# Altium PCB BOARD.PcbDoc
Units mm, origin at the board's own origin, x right, y up, seen from the top; angles counter-clockwise.
Board outline 38 x 24 mm, 2 copper layers (Top Layer, Bottom Layer), stack 1.18 mm thick; 27 components, 23 nets, 100 pads, 105 vias.
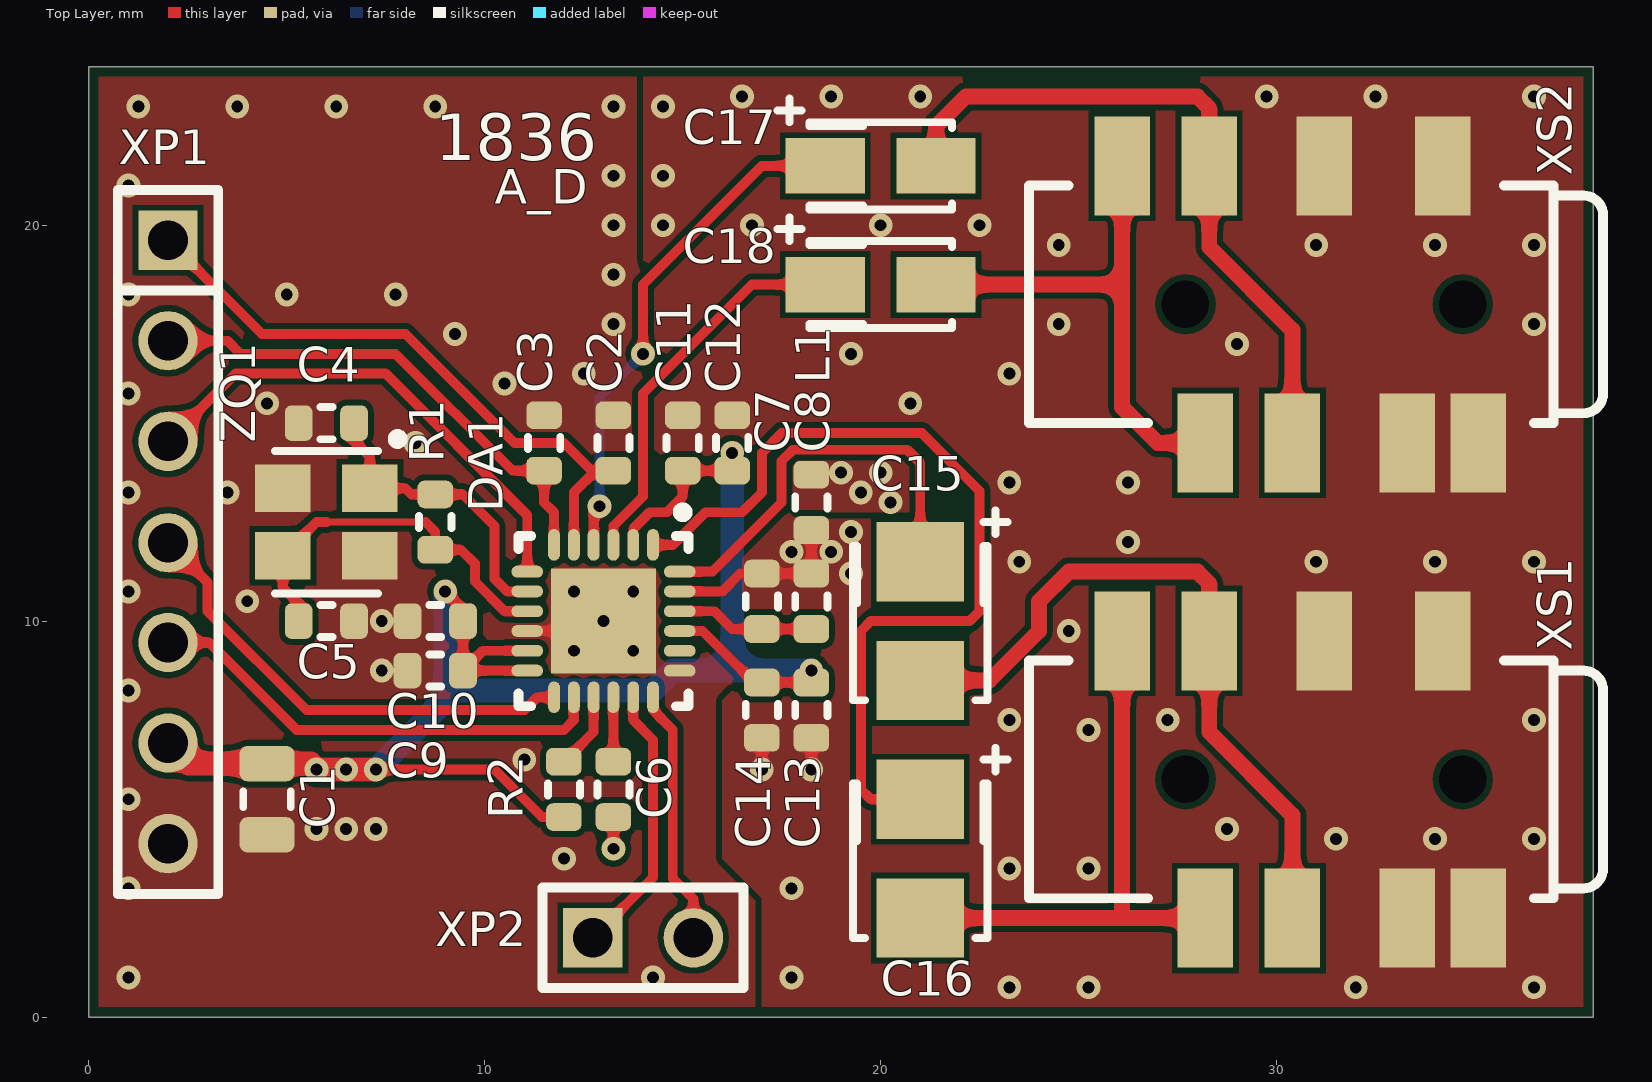
[diagram p0: Top Layer view]
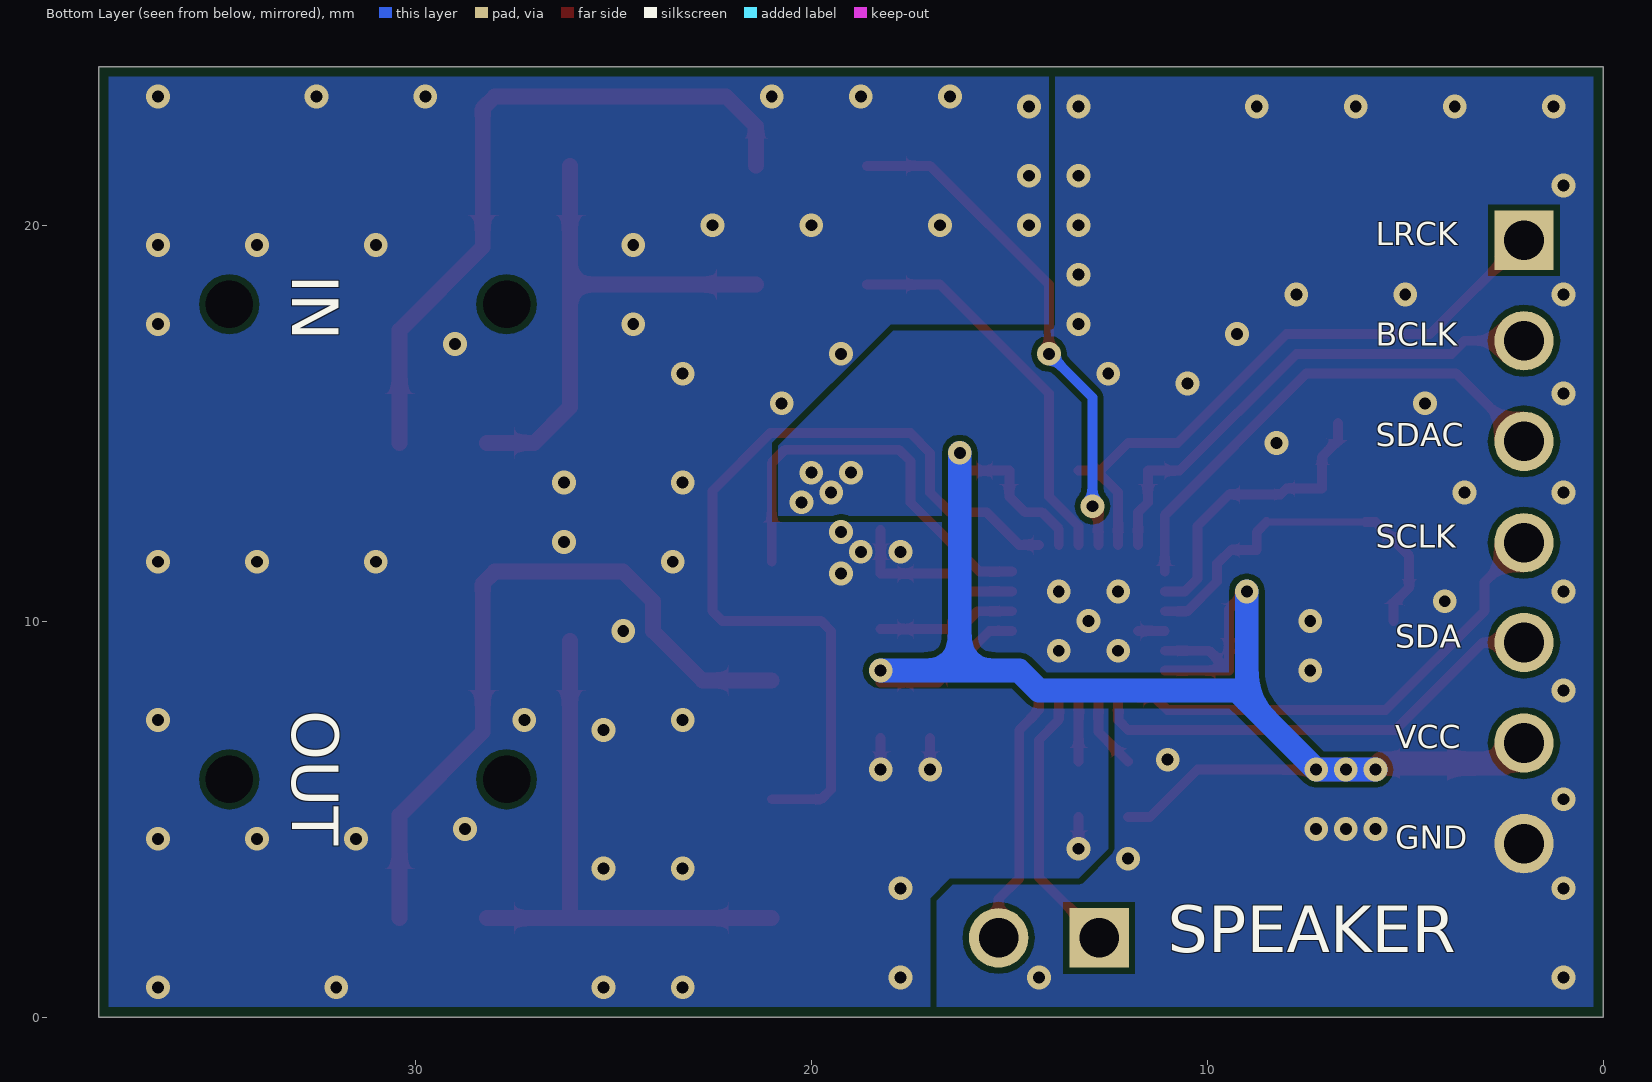
[diagram p1: Bottom Layer view, seen from below]
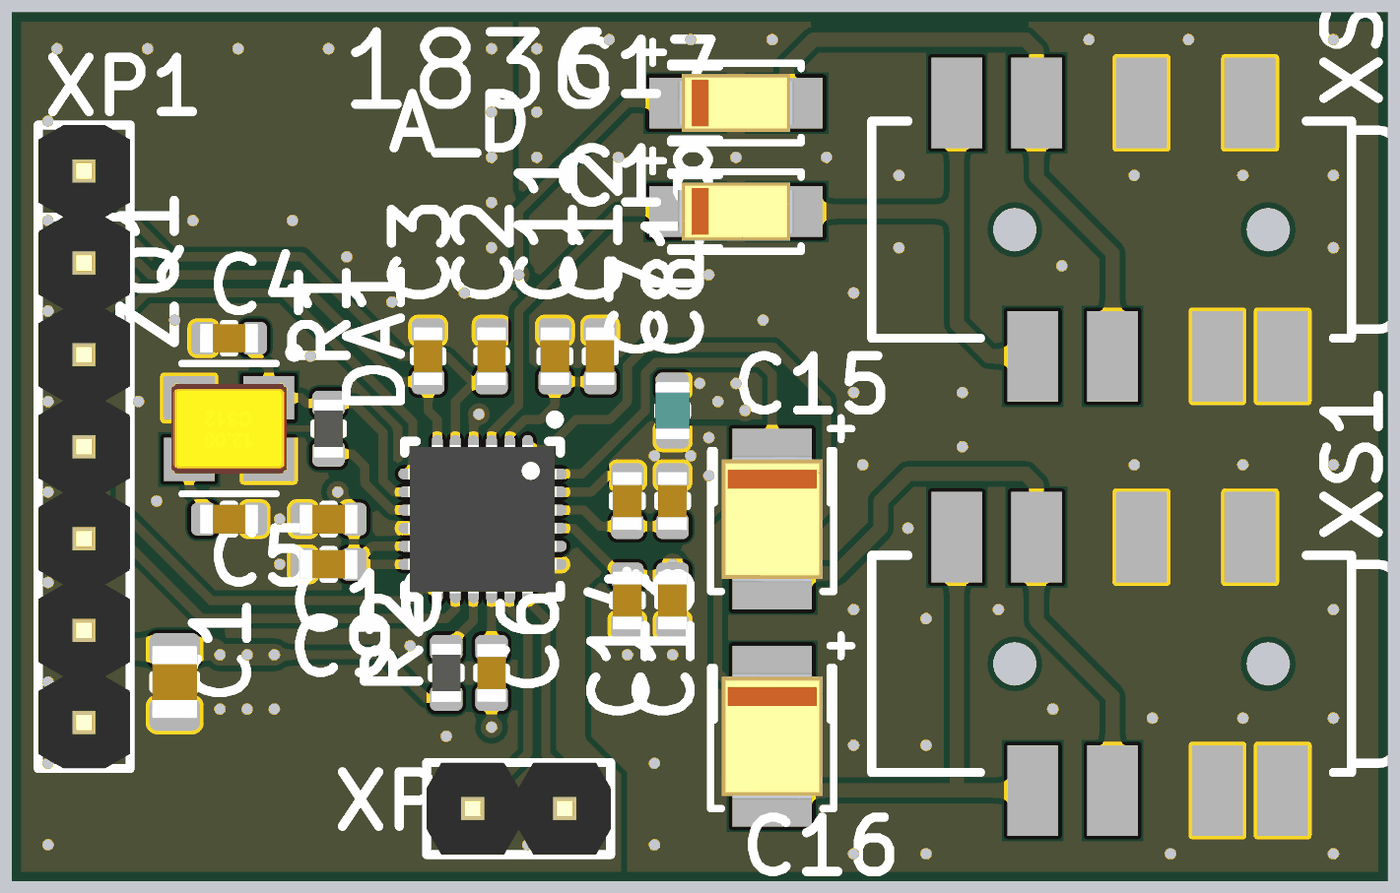
[diagram p2: 3D render of the assembled board from above, using the file's embedded part models]

## Layer stack, top to bottom
Top Solder: solder mask 0.01, Solder Resist, Dk 3.5
Top Layer: signal copper 0.03
Dielectric1: core 1.12, FR-4, Dk 4.2
Bottom Layer: signal copper 0.03
Bottom Solder: solder mask 0.01, Solder Resist, Dk 3.5

## Board outline
0,0 38,0 38,24 0,24

## Design rules (kind name [scope] priority, off if disabled: settings)
BoardOutlineClearance [All] p1: gap=0.25 ignorepadtopadclearanceinfootprint=FALSE
Clearance [All] p1: gap=0.152 ignorepadtopadclearanceinfootprint=FALSE
ComponentClearance [All] p1 off: gap=0.25 collisioncheckmode=3 verticalgap=0.25 showdistances=FALSE
DiffPairsRouting [All] p1: maxlimit=0.4 minlimit=0.15 mostfreqgap=0.25 toplayer_minwidth=0.2 toplayer_maxwidth=0.4 toplayer_prefwidth=0.25 bottomlayer_minwidth=0.2 bottomlayer_maxwidth=0.4 bottomlayer_prefwidth=0.25 maxuncoupledlength=12
Height [All] p1: minheight=0 maxheight=25 prefheight=25
HoleSize [All] p1: absolutevalues=TRUE maxlimit=6 minlimit=0.3 maxpercent=80.000 minpercent=20.000
HoleToHoleClearance [All] p1: gap=0.25 allowstackedmicrovias=TRUE
MinimumSolderMaskSliver [All] p1 off: minsoldermaskwidth=0.254
PlaneClearance [All] p1: clearance=0.5
PlaneConnect [All] p1: planeconnectstyle=Relief reliefexpansion=0.5 reliefentries=4 reliefconductorwidth=0.25 reliefairgap=0.25
PolygonConnect "Schematic Polygon Connect Style_1" [InNet('GND')] p1: connectstyle=Direct reliefconductorwidth=0.254 reliefentries=4 polygonreliefangle="45 Angle" airgapwidth=0.254
PolygonConnect "Schematic Polygon Connect Style" [InNet('AGND')] p2: connectstyle=Direct reliefconductorwidth=0.254 reliefentries=4 polygonreliefangle="45 Angle" airgapwidth=0.254
PolygonConnect PolygonConnect_DirectConnect [InComponentClass('DirectConnect')] p3: connectstyle=Direct reliefconductorwidth=0.254 reliefentries=4 polygonreliefangle="90 Angle" airgapwidth=0.254
PolygonConnect PolygonConnect_Components [InComponent('C*') OR InComponent('R*') OR InComponent('NR*') OR InComponent('DA*') OR InComponent('DD*') OR InComponent('HL*')] p4: connectstyle=Relief reliefconductorwidth=0.2 reliefentries=4 polygonreliefangle="90 Angle" airgapwidth=0.25
PolygonConnect PolygonConnect_Connectors [All vs (InPadClass('All Pads'))] p5: connectstyle=Relief reliefconductorwidth=0.6 reliefentries=4 polygonreliefangle="90 Angle" airgapwidth=0.3
PolygonConnect PolygonConnect_Via [All] p6: connectstyle=Direct reliefconductorwidth=0.254 reliefentries=4 polygonreliefangle="90 Angle" airgapwidth=0.254
RoutingCorners [All] p1: cornerstyle=45-Degree minsetback=1.5 maxsetback=3.5
RoutingVias [All] p1: holewidth=0.6 width=1.2 viastyle="Through Hole" minholewidth=0.3 minwidth=0.6 maxholewidth=1 maxwidth=2
SMDEntry [All] p1: side=TRUE corner=TRUE anyangle=TRUE
SilkToSilkClearance [All] p1 off: silktosilkclearance=0.254
SilkToSolderMaskClearance [IsPad] p1 off: minsilkscreentomaskgap=0.254 clearancetoexposedcopper=TRUE
SolderMaskExpansion [All] p1: expansion=0.1
Width [All] p1: maxlimit=8 minlimit=0.152 preferedwidth=0.6
Width Width_TrackEnds [All] p2 off: maxlimit=0.25 minlimit=0.25 preferedwidth=0.25 checkconnectedcopper=TRUE
19 further rules are at their usual default settings.

## Components (designator, comment, footprint, x,y, rotation, side; value= is the part's Value field where it differs from the comment)
C1 "Capacitor" C0805_L 4.5,5.5 r90 top value=22uF
C2 "Capacitor" C0603_L 13.25,14.5 r270 top value=22pF
C3 "Capacitor" C0603_L 11.5,14.5 r270 top value=22pF
C4 "Capacitor" C0603_L 6,15 r0 top value=12pF
C5 "Capacitor" C0603_L 6,10 r180 top value=12pF
C6 "Capacitor" C0603_L 13.25,5.75 r90 top value=1uF
C7 "Capacitor" C0603_L 17,10.5 r270 top value=0.1uF
C8 "Capacitor" C0603_L 18.25,10.5 r270 top value=4.7uF
C9 "Capacitor" C0603_L 8.75,8.75 r180 top value=1uF
C10 "Capacitor" C0603_L 8.75,10 r180 top value=1000pF
C11 "Capacitor" C0603_L 15,14.5 r90 top value=1uF
C12 "Capacitor" C0603_L 16.25,14.5 r90 top value=1000pF
C13 "Capacitor" C0603_L 18.25,7.75 r270 top value=10uF
C14 "Capacitor" C0603_L 17,7.75 r270 top value=1000pF
C15 "Capacitor-T" C3528-p 21,10 r270 top value=100uF
C16 "Capacitor-T" C3528-p 21,4 r270 top value=100uF
C17 "Capacitor-T" C3216-p 20,21.5 r0 top value=1uF
C18 "Capacitor-T" C3216-p 20,18.5 r0 top value=1uF
DA1 "ALC5628" QFN-24_050P400X400X090_N 13,10 r270 top locked value=ALC5628-GR
L1 "FerriteBead" L0603_L 18.25,13 r270 top value=BLM18PG121SN1
R1 "Resistor" R0603_L 8.75,12.5 r270 top value=1meg
R2 "Resistor" R0603_L 12,5.75 r90 top value=0
XP1 "Text" PLS-7 2,12 r270 top value=PLS-7
XP2 "SPK" PLS-2 14,2 r0 top value=PLS-2
XS1 "OUT" PJ30930-Series 37,6 r90 top value=PJ30930-Q-LC0AG00TR-7260
XS2 "IN" PJ30930-Series 37,18 r90 top value=PJ30930-Q-LC0AG00TR-7260
ZQ1 "Crystal-1_3p_S" "SMD 3.2x2.5mm" 6,12.5 r180 top value=MCSJK-7U-24.576-12-30-60-B-30

## Footprints (in the part's own frame and the unit in brackets; to place one, negate y for a bottom-side part, rotate by r counter-clockwise, add the part's x,y. Pads: shape width x height; smd on the part's side, far side on the other; paste and mask are expansions set on the pad)
C0603_L [mm] "Chip Capacitor; Body 1.6 x 0.8 mm (LxW typ)"
  rrect50% 0.7x0.9 smd: 1(-0.7,0) 2(0.7,0)
  silkscreen extent -0.15,-0.41 0.15,0.41, body extent -0.8,-0.4 0.8,0.4, height 0.91
C0805_L [mm] "Chip Capacitor; Body 2.0 x 1.2 mm (LxW typ)"
  rrect50% 0.9x1.4 smd: 1(-0.9,0) 2(0.9,0)
  silkscreen extent -0.2,-0.6 0.2,0.6, body extent -1,-0.62 1,0.63, height 1.01
C3216-p [mm] "Type A"
  rect 2x1.4 smd: 1(-1.4,0) 2(1.4,0)
  silkscreen extent -2.6,-1.1 1.8,1.7, body extent -1.6,-0.8 1.6,0.8, height 1.8
C3528-p [mm] "Type B"
  rect 2x2.2 smd: 1(-1.5,0) 2(1.5,0)
  silkscreen extent -2.8,-1.7 2,2.2, body extent -1.75,-1.4 1.75,1.4, height 2.1
L0603_L [mm] "Chip Coil; Body 1.6 x 0.8 mm (LxW typ)"
  rrect50% 0.7x0.9 smd: 1(-0.7,0) 2(0.7,0)
  silkscreen extent -0.15,-0.41 0.15,0.41, body extent -0.8,-0.47 0.8,0.48, height 0.8
PJ30930-Series [mm]
  round 0 hole 1.2 unplated: 0(0,9.3) 0(0,2.3)
  rect 2.5x1.4 smd: 1(3.5,2.8) 2(-3.5,8.8) 3(3.5,8.7) 4(3.5,5.8) 5(3.5,10.9) 6(-3.5,6.6) 7(-3.5,3.7) 8(-3.5,1.9)
  silkscreen extent -3,-1.25 3,13.25
PLS-2 [mm]
  rect 1.5x1.5 hole 1: 1(-1.27,0)
  round 1.5 hole 1: 2(1.27,0)
  silkscreen extent -2.54,-1.27 2.54,1.27, body extent -2.54,-1.27 2.54,1.27, height 8.9
PLS-7 [mm]
  rect 1.5x1.5 hole 1: 1(-7.62,0)
  round 1.5 hole 1: 2(-5.08,0) 3(-2.54,0) 4(0.02,0) 5(2.54,0) 6(5.08,0) 7(7.62,0)
  silkscreen extent -8.89,-1.27 8.89,1.27, body extent -8.89,-1.27 8.89,1.27, height 8.9
QFN-24_050P400X400X090_N [mm] "QFN, 24-Leads, Body 4,00x4,00mm, Pitch 0,50mm, Thermal Pad 2,65x2,65mm, IPC Medium Density"
  oval 0.8x0.3 smd: 1(-1.925,1.25) 2(-1.925,0.75) 3(-1.925,0.25) 4(-1.925,-0.25) 5(-1.925,-0.75) 6(-1.925,-1.25) 13(1.925,-1.25) 14(1.925,-0.75) 15(1.925,-0.25) 16(1.925,0.25) 17(1.925,0.75) 18(1.925,1.25)
  oval 0.3x0.8 smd: 7(-1.25,-1.925) 8(-0.75,-1.925) 9(-0.25,-1.925) 10(0.25,-1.925) 11(0.75,-1.925) 12(1.25,-1.925) 19(1.25,1.925) 20(0.75,1.925) 21(0.25,1.925) 22(-0.25,1.925) 23(-0.75,1.925) 24(-1.25,1.925)
  rect 2.65x2.65 smd: TP(0,0)
  silkscreen extent -2.87,-2.15 2.15,2.15, body extent -2.05,-2.05 2.05,2.05, height 0.9
R0603_L [mm] "Chip Resistor; Body 1.6 x 0.8 mm (LxW typ)"
  rrect50% 0.7x0.9 smd: 1(-0.7,0) 2(0.7,0)
  silkscreen extent -0.15,-0.41 0.15,0.41, body extent -0.8,-0.41 0.8,0.41, height 0.46
"SMD 3.2x2.5mm" [mm]
  rect 1.4x1.2 smd paste+0: 1(-1.1,-0.85) 2(1.1,-0.85) 3(1.1,0.85) 4(-1.1,0.85)
  silkscreen extent -1.92,-2.22 1.3,1.8, body extent -1.6,-1.25 1.6,1.25, height 0.77

## Part data
C1: library part GRM21BR60J226ME39L, Dielectric Type=X5R, Manufacturer=Murata, Tolerance=±20%, Voltage=6.3V, Working Temperature Max=+85°С, Working Temperature Min=-55°С, Application Category=1, ID=140, Part Number=GRM21BR60J226ME39L, Published=18.05.2010, Publisher="Andrew Danich", Type=Конденсатор
C2 C3: library part GRM1885C1H220JA01D, Dielectric Type=NP0, Manufacturer=Murata, Tolerance=±5%, Voltage=50V, Working Temperature Max=+125°С, Working Temperature Min=-55°С, Application Category=1, ID=122, Part Number=GRM1885C1H220JA01D, Published=18.05.2010, Publisher="Andrew Danich", Type=Конденсатор
C4 C5: library part GCM1885C2A120JA16D, Dielectric Type=NP0, Manufacturer=Murata, Tolerance=±5%, Voltage=100V, Working Temperature Max=+125°С, Working Temperature Min=-55°С, Application Category=1, ID=121, Part Number=GCM1885C2A120JA16D, Published=18.05.2010, Publisher="Andrew Danich", Type=Конденсатор
C6 C9 C11: library part GCM188R71E105KA64D, Dielectric Type=X7R, Manufacturer=Murata, Tolerance=±10%, Voltage=25V, Working Temperature Max=+85°С, Working Temperature Min=-55°С, Application Category=1, ID=134, Part Number=GCM188R71E105KA64D, Published=18.05.2010, Publisher="Andrew Danich", Type=Конденсатор
C7: library part GRM188R72A104KA35D, Dielectric Type=X7R, Manufacturer=Murata, Tolerance=±10%, Voltage=100V, Working Temperature Max=+125°С, Working Temperature Min=-55°С, Application Category=1, ID=232, Part Number=GRM188R72A104KA35D, Published=18.05.2010, Publisher="Andrew Danich", Type=Конденсатор
C8: library part GRT188C81E475KE13D, Dielectric Type=X6S, Manufacturer=Murata, Tolerance=±20%, Voltage=25V, Working Temperature Max=+105°С, Working Temperature Min=-55°С, Application Category=1, ID=175, Part Number=GRT188C81E475KE13D, Published=18.05.2010, Publisher="Andrew Danich", Type=Конденсатор
C10 C12 C14: library part GRM1885C2A102JA01D, Dielectric Type=NP0, Manufacturer=Murata, Tolerance=±5%, Voltage=100V, Working Temperature Max=+125°С, Working Temperature Min=-55°С, Application Category=1, ID=135, Part Number=GRM1885C2A102JA01D, Published=18.05.2010, Publisher="Andrew Danich", Type=Конденсатор
C13: library part GRM188C80J106MA73D, Dielectric Type=X6S, Manufacturer=Murata, Tolerance=±20%, Voltage=6.3V, Working Temperature Max=+105°С, Working Temperature Min=-55°С, Application Category=1, Functional Analog=ZRB18AC81A106KE01L, ID=248, Part Number=GRM188C80J106MA73D, Published=18.05.2010, Publisher="Andrew Danich", Type=Конденсатор
C15 C16: library part T520B107M006ATE040, Leakage Current=63uA, Manufacturer=Kemet, Tolerance=±20%, Voltage=6.3V, Working Temperature Max=+125°С, Working Temperature Min=-55°С, Application Category=1, ESR=40mohm, ID=26, Part Number=T520B107M006ATE040, Published=23.04.2010, Publisher="Andrew Danich", Type=Конденсатор
C17 C18: library part 293D105X9016A2TE3, Manufacturer="Vishay Intertechnology", Tolerance=±10%, Voltage=16V, Application Category=1, ESR=9.3ohm, ID=4, Part Number=293D105X9016A2TE3, Published=23.04.2010, Publisher="Andrew Danich", Type=Конденсатор
DA1: library part ALC5628-GR, Manufacturer=Realtek, Working Temperature Max=+85°С, Working Temperature Min=-20°С, Application Category=1, Channel=2, Functional Analog=ALC5628-GRT, ID=8, Interface=I2S/PCM, Part Number=ALC5628-GR, Published=06.09.2018, Publisher="Andrew Danich", Supply Operation=+2.3…3.6V, THD=-86dB, Type=Микросхема
L1: library part BLM18PG121SN1, DC Resistance=0.05ohm, Inductor Type=EMIFIL, Manufacturer=Murata, Rated Current=2A, Working Temperature Max=+125°С, Working Temperature Min=-55°С, Application Category=1, ID=4, Impedance at 100Mhz=120ohm, Part Number=BLM18PG121SN1, Published=14.11.2014, Publisher="Andrew Danich", Type=Дроссель
R1: library part RC0603JR-071ML, Limit Voltage=50V, Manufacturer=Yageo, Temperature Coefficient=100ppm, Tolerance=±5%, Total Power Dissipation=0.1W, Working Temperature Max=+155°С, Working Temperature Min=-55°С, Application Category=1, ID=20, Part Number=RC0603JR-071ML, Published=24.03.2010, Publisher="Andrew Danich", Series Type=Thick-Film, Type=Резистор
R2: library part RC0603JR-070R, Limit Voltage=50V, Manufacturer=Yageo, Temperature Coefficient=100ppm, Tolerance=±5%, Total Power Dissipation=0.1W, Working Temperature Max=+155°С, Working Temperature Min=-55°С, Application Category=1, Functional Analog="RC0603FR-070RL, CR0603-J/-000E", ID=5, Part Number=RC0603JR-070R, Published=24.03.2010, Publisher="Andrew Danich", Series Type=Thick-Film, Type=Резистор
XP1: library part PLS-7, Limit Current=3A, Limit Voltage=250V, Resistance=15momh, Application Category=1, Connector Type=Male, ID=6, Part Number=PLS-7, Pins=7, Pitch=2.54mm, Published=07.03.2013, Publisher="Andrew Danich", Surface Finish=Gold, Type=Вилка
XP2: library part PLS-2, Limit Current=3A, Limit Voltage=250V, Resistance=15momh, Application Category=1, Connector Type=Male, ID=1, Part Number=PLS-2, Pins=2, Pitch=2.54mm, Published=07.03.2013, Publisher="Andrew Danich", Surface Finish=Gold, Type=Вилка
XS1 XS2: library part PJ30930-Q-LC0AG00TR-7260, Limit Current=0.5A, Limit Voltage=30V, Manufacturer="Dongnan Electronics", Working Temperature Max=+85°С, Working Temperature Min=-25°С, Application Category=1, Connector Type=Female, Functional Analog=PJ30930-Q-LC0AG00-7260, ID=11, Mount Type=Surface, Part Number=PJ30930-Q-LC0AG00TR-7260, Pins=8, Published=06.09.2018, Publisher="Andrew Danich", Standart="3.5 mm", Type=Розетка
ZQ1: library part MCSJK-7U-24.576-12-30-60-B-30, Load Capacitance=12pF, Manufacturer=Multicomp, Output Frequency=24.576МГц, Temperature Coefficient=±30ppm, Working Temperature Max=+70°С, Working Temperature Min=-20°С, Application Category=1, Functional Analog=-, ID=27, Part Number=MCSJK-7U-24.576-12-30-60-B-30, Published=06.09.2018, Publisher="Andrew Danich", Type=Резонатор

## Via types
v1: diameter 0.6, hole 0.3, Top Layer to Bottom Layer, tented both sides, 105 vias

## Nets (pads, with @x,y where several pads share a name; then routed paths per layer and width w, separated by ;. In a path a pad name is that pad's centre, name@x,y a point inside that pad or via, vN(x,y) a via of type N, cw(c..) or ccw(c..) an arc to the next point about the centre after c; other vN are vias at no path point)
AGND: C6.1 C7.1 C8.1 C11.2 C12.2 C13.2 C14.2 DA1.23 L1.2 XS1.1 XS1.4 XS1.7 XS1.8 XS2.1 XS2.4 XS2.7 XS2.8 | length 7
  Top Layer w0.25: v1(13.25,4.25) C6.1 ; DA1.23 16,10.75 16.45,11.2 C7.1 C8.1 L1.2 ; v1(17,6.25) C14.2 ; v1(18.25,6.25) C13.2
  other v1: 23.25,0.75 25.25,0.75 32,0.75 36.5,0.75 17.75,1 17.75,3.25 23.25,3.75 25.25,3.75 31.5,4.5 34,4.5 36.5,4.5 28.75,4.75 25.25,7.25 23.25,7.5 27.25,7.5 36.5,7.5 24.75,9.75 19.25,11.2 23.5,11.5 31,11.5 34,11.5 36.5,11.5 17.75,11.75 18.75,11.75 26.25,12 19.25,12.25 23.25,13.5 26.25,13.5 20.75,15.5 23.25,16.25 19.25,16.75 29,17 24.5,17.5 36.5,17.5 24.5,19.5 31,19.5 34,19.5 36.5,19.5 14.5,20 16.75,20 20,20 22.5,20 14.5,21.25 14.5,23 16.5,23.25 18.75,23.25 21,23.25 29.75,23.25 32.5,23.25 36.5,23.25
BCLK: C3.2 DA1.6 XP1.2 | length 12.8
  Top Layer w0.25: XP1.2 3.5,17.08 3.83,16.75 7.75,16.75 10.7,13.8 C3.2 11.5,13 11.75,12.75 DA1.6
GND: C1.1 C2.1 C3.1 C4.1 C5.1 C9.2 C10.2 DA1.10 DA1.19 DA1.TP L1.1 XP1.7 ZQ1.2 ZQ1.4 | length 0.7
  Top Layer w0.25: DA1.10 DA1.TP@11.75,9.75
  other v1: 1,1 14.25,1 1,3.25 12,4 5.75,4.75 6.5,4.75 7.25,4.75 1,5.5 11,6.5 1,8.25 7.4,8.75 12.25,9.25 13.75,9.25 7.4,10 13,10 4,10.5 1,10.75 12.25,10.75 13.75,10.75 20.25,13 1,13.25 3.5,13.25 19.5,13.25 19,13.75 20,13.75 8.25,14.5 4.5,15.5 1,15.75 10.5,16 12.5,16.25 9.25,17.25 13.25,17.5 1,18.25 5,18.25 7.75,18.25 13.25,18.75 13.25,20 1,21 13.25,21.25 1.25,23 3.75,23 6.25,23 8.75,23 13.25,23
IN_L: C18.1 DA1.3 | length 9.9
  Top Layer w0.25: DA1.3 13.25,12.4 14,13.15 14,15.75 16.75,18.5 C18.1
IN_R: C17.1 DA1.4 | length 12.9
  Top Layer w0.25: DA1.4 12.75,12.75 v1(12.9,12.9) ; v1(14,16.75) 14,18.5 17,21.5 C17.1
  Bottom Layer w0.25: v1(12.9,12.9) 12.9,15.65 v1(14,16.75)
LRCK: C2.2 DA1.5 XP1.1 | length 15.8
  Top Layer w0.25: XP1.1 4.37,17.25 8,17.25 10.75,14.5 12,14.5 12.7,13.8 C2.2@12.8,13.8 ; DA1.5 12.25,13.25 C2.2@12.8,13.8 ; C2.2 C2.2@12.8,13.8
NetC4_2: C4.2 DA1.8 R1.1 ZQ1.1 | length 7.6
  Top Layer w0.25: C4.2 6.7,14.55 7.1,14.15 ZQ1.1 8,13.35 8.15,13.2 R1.1 9.45,13.2 10.25,12.4 10.25,11.069 10.569,10.75 DA1.8
NetC5_2: C5.2 DA1.9 R1.2 ZQ1.3 | length 9.8
  Top Layer w0.18: 6,12.5 8.5,12.5
  Top Layer w0.25: C5.2 5.3,10.45 4.9,10.85 ZQ1.3 5.75,12.5 6,12.5 ; 8.5,12.5 8.75,12.25 R1.2 9.4,11.8 9.75,11.45 9.75,11 10.5,10.25 DA1.9
NetC6_2: C6.2 DA1.16 | length 1.6
  Top Layer w0.25: C6.2 DA1.16
NetC7_2: C7.2 C8.2 DA1.22 | length 3.5
  Top Layer w0.25: DA1.22 15.8,10.25 16.25,9.8 C7.2 C8.2
NetC15_2: C15.2 XS1.3 XS1.6 | length 18.3
  Top Layer w0.4: C15.2 22.75,8.5 24,9.75 24,10.5 24.75,11.25 28,11.25 28.3,10.95 XS1.3 28.3,7.2 30.4,5.1 XS1.6
NetC16_2: C16.2 XS1.2 XS1.5 | length 14.2
  Top Layer w0.4: C16.2 26,2.5 ; XS1.5 26.1,2.6 26,2.5 ; XS1.2 26,2.5
NetC17_2: C17.2 XS2.3 XS2.6 | length 17.7
  Top Layer w0.4: C17.2 21.4,22.5 22.15,23.25 28,23.25 28.3,22.95 XS2.3 28.3,19.45 30.4,17.35 XS2.6
NetC18_2: C18.2 XS2.2 XS2.5 | length 13.3
  Top Layer w0.4: C18.2 26.1,18.5 ; XS2.5 26.1,18.5 ; XS2.2 27,14.5 26.1,15.4 26.1,18.5
NetDA1_15: DA1.15 R2.2 | length 1.9
  Top Layer w0.25: R2.2 12.75,7.2 DA1.15
OUT_L: C16.1 DA1.1 | length 22.5
  Top Layer w0.25: DA1.1 14.75,11.925 15.575,12.75 16.5,12.75 17,13.25 17,14.25 17.5,14.75 21.04,14.75 22.5,13.29 22.5,10.25 22.25,10 19.75,10 19.5,9.75 19.5,5.75 19.75,5.5 C16.1
OUT_R: C15.1 DA1.24 | length 10.6
  Top Layer w0.25: DA1.24 15.75,11.25 17.5,13 17.5,14.04 17.788,14.327 20.673,14.327 21,14 C15.1
SCLK: DA1.13 XP1.4 | length 12.1
  Top Layer w0.25: XP1.4 3,10.98 3,10.25 5.5,7.75 11,7.75 11.325,8.075 DA1.13
SDA: DA1.14 XP1.5 | length 11.8
  Top Layer w0.25: XP1.5 3.04,9.46 5.25,7.25 12,7.25 12.25,7.5 DA1.14
SDAC: DA1.7 XP1.3 | length 12.7
  Top Layer w0.25: XP1.3 3.71,16.25 7.5,16.25 11.075,12.675 DA1.7
SPK+: DA1.17 XP2.1 | length 6.9
  Top Layer w0.25: XP2.1 14.25,3.52 14.25,7 13.75,7.5 DA1.17
SPK-: DA1.18 XP2.2 | length 6.5
  Top Layer w0.25: DA1.18 14.25,7.75 14.75,7.25 14.75,3.5 15.27,2.98 XP2.2
VCC3P3: C1.2 C9.1 C10.1 C11.1 C12.1 C13.1 C14.1 DA1.2 DA1.11 DA1.12 DA1.21 R2.1 XP1.6 | length 46.3
  Top Layer w0.25: v1(7.25,6.25) 10.25,6.25 11.45,5.05 R2.1 ; v1(9,10.75) 9.45,10.3 C10.1 C9.1 ; DA1.12 C9.1 ; DA1.11 9.95,9.25 C9.1 ; DA1.2 13.75,12.331 14.169,12.75 14.6,12.75 15,13.15 C11.1 C12.1 ; DA1.21 15.5,9.75 16.8,8.45 C14.1 C13.1 v1(18.25,8.75)
  Top Layer w0.6: XP1.6 2.52,6.4 C1.2 5.6,6.4 v1(5.75,6.25) v1(6.5,6.25) v1(7.25,6.25)
  Bottom Layer w0.6: v1(5.75,6.25) v1(6.5,6.25) v1(7.25,6.25) 9,8 ; v1(9,10.75) 9,8 ; v1(16.25,14.25) 16.25,8.75 ; v1(18.25,8.75) 16.25,8.75 ; 9,8 9.25,8.25 14.25,8.25 14.75,8.75 16.25,8.75
pads on no net: DA1.20 XS1.0 XS2.0

## Polygon pours and split planes (outlines as drawn)
GND on Bottom Layer "Bottom Layer-GND" (solid, pour order 46): 0,24 0,0 21,0 21,24
AGND on Bottom Layer "Bottom Layer-AGND" (solid, pour order 44): 38,0 38,24 14,24 14,17.5 18,17.5 21,14.5 21,12.5 16.5,12.5 16.5,8.5 12.5,8.5 12.5,4.25 13.25,3.5 16.5,3.5 17,3 17,0
GND on Top Layer "Top Layer-GND 1" (solid, pour order 52): 0,24 17,24 17,0 0,0
AGND on Top Layer "Top Layer-AGND" (solid, pour order 50): 38,0 38,24 14,24 14,14.5 16.5,12 16.5,8.5 16,8 16,4 17,3 17,0
GND on Top Layer "Top Layer-GND" (solid, pour order 48): 17.5,14.5 21,14.5 21,12.75 17.5,12.75

## Silkscreen, mask and mechanical layers (free items; w line width, h text height)
Top Overlay:
  text "1836" at 8.75,21.25 h2
  text "A_D" at 10.25,20.25 h1.5
Bottom Overlay:
  text "LRCK" at 5.75,19.29 h1
  text "IN" at 33.5,18.75 h2 r90
  text "BCLK" at 5.75,16.75 h1
  text "SDAC" at 5.75,14.21 h1
  text "SCLK" at 5.75,11.65 h1
  text "SDA" at 5.25,9.13 h1
  text "OUT" at 33.5,7.75 h2 r90
  text "VCC" at 5.25,6.59 h1
  text "GND" at 5.25,4.05 h1
  text "SPEAKER" at 11,1.25 h2
1 - Board Outline:
  the board outline again, w0.1